# Altium PCB multisheet PCB1.PcbDoc
Units mil, origin at the board's own origin, x right, y up, seen from the top; angles counter-clockwise.
Board outline 3500 x 2500 mil, 4 copper layers (Top Layer 1, Top Layer, Bottom Layer, Bottom Layer 1), stack 23.756 mil thick; 6 components, 5 nets, 49 pads, 0 vias.
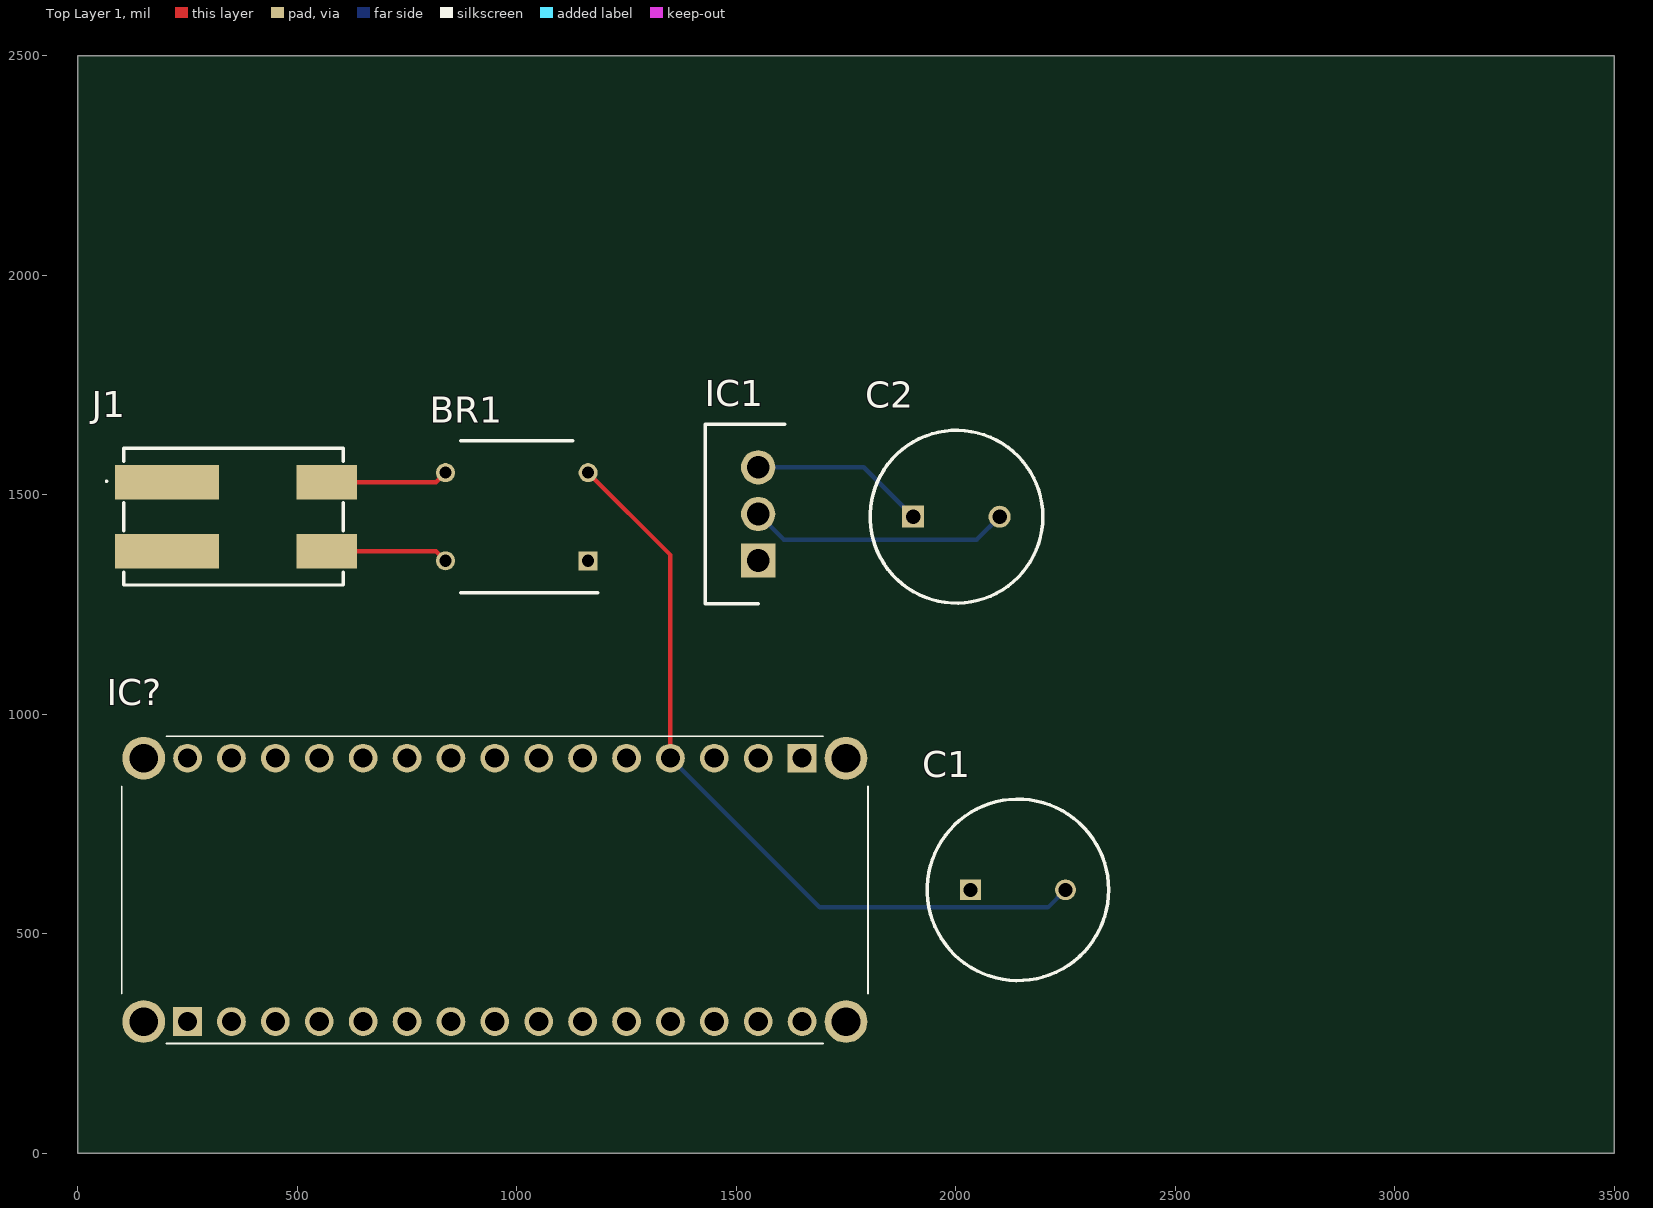
[diagram p0: Top Layer 1 view]
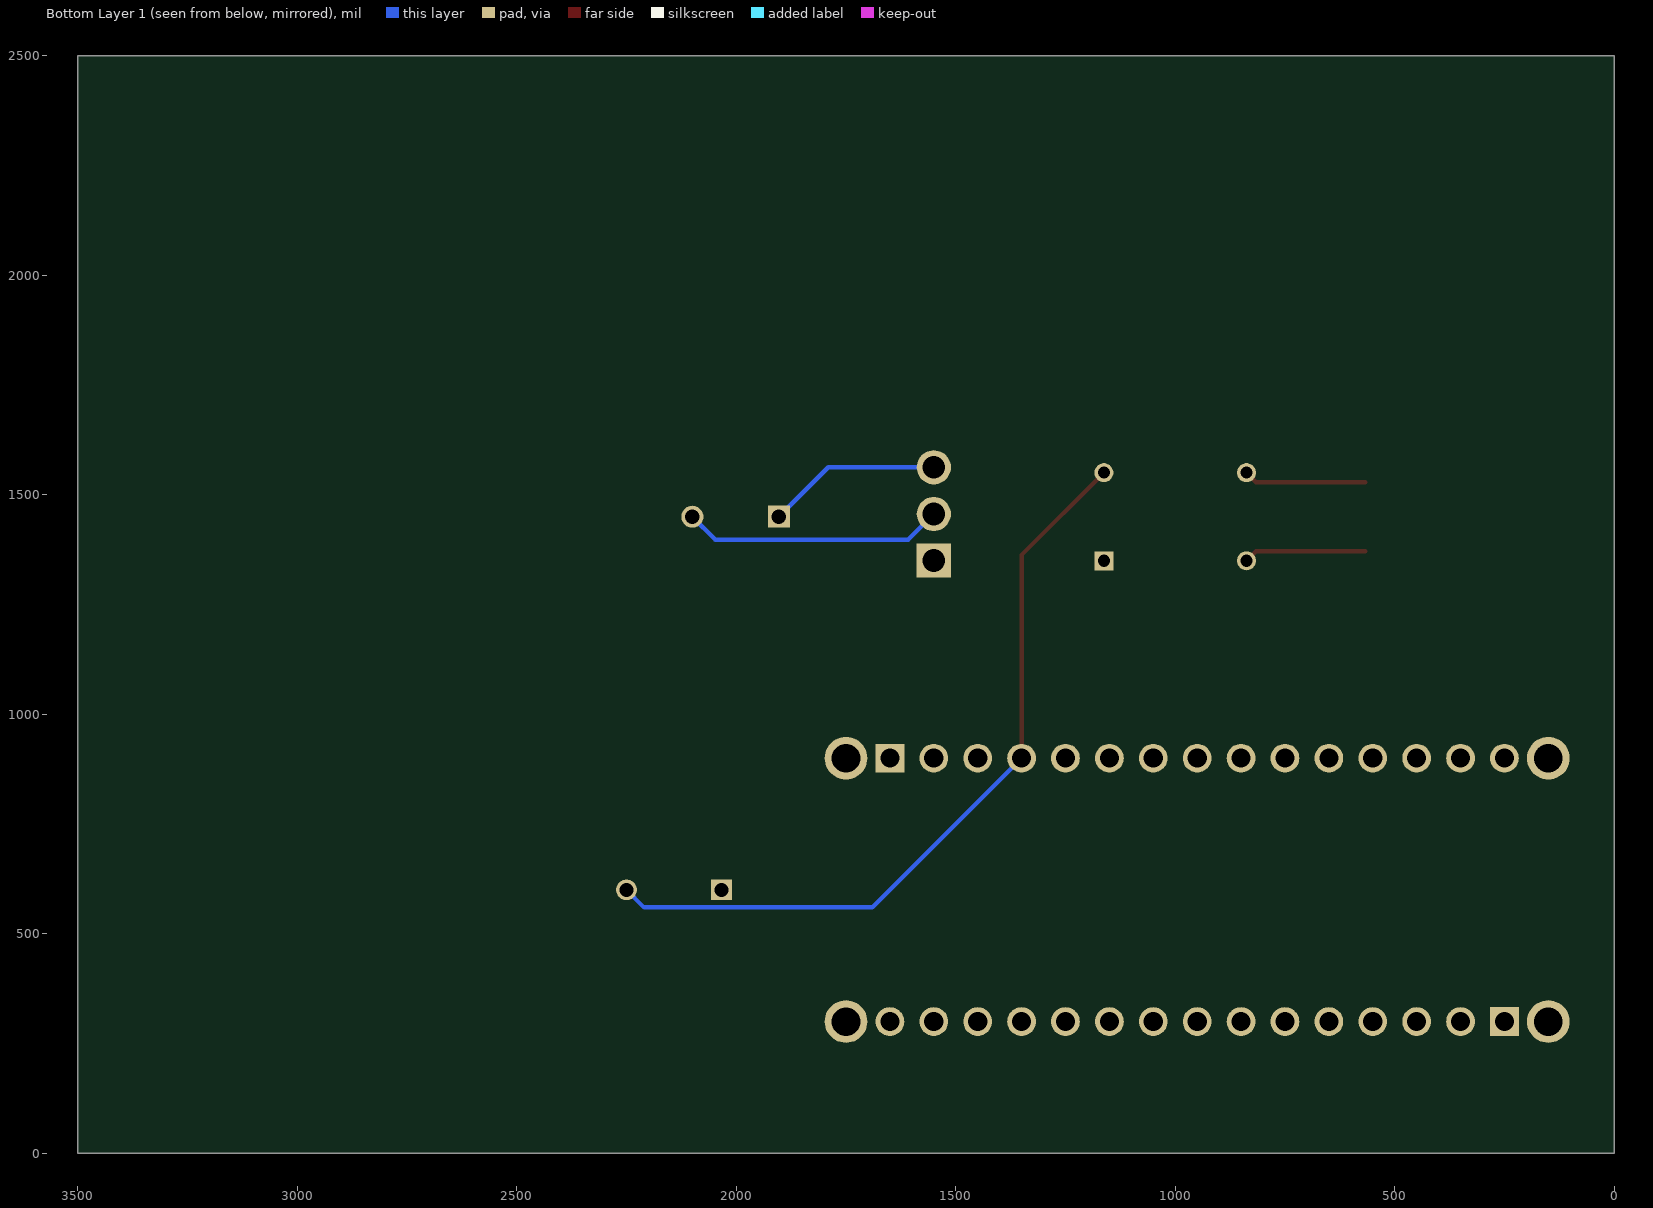
[diagram p1: Bottom Layer 1 view, seen from below]
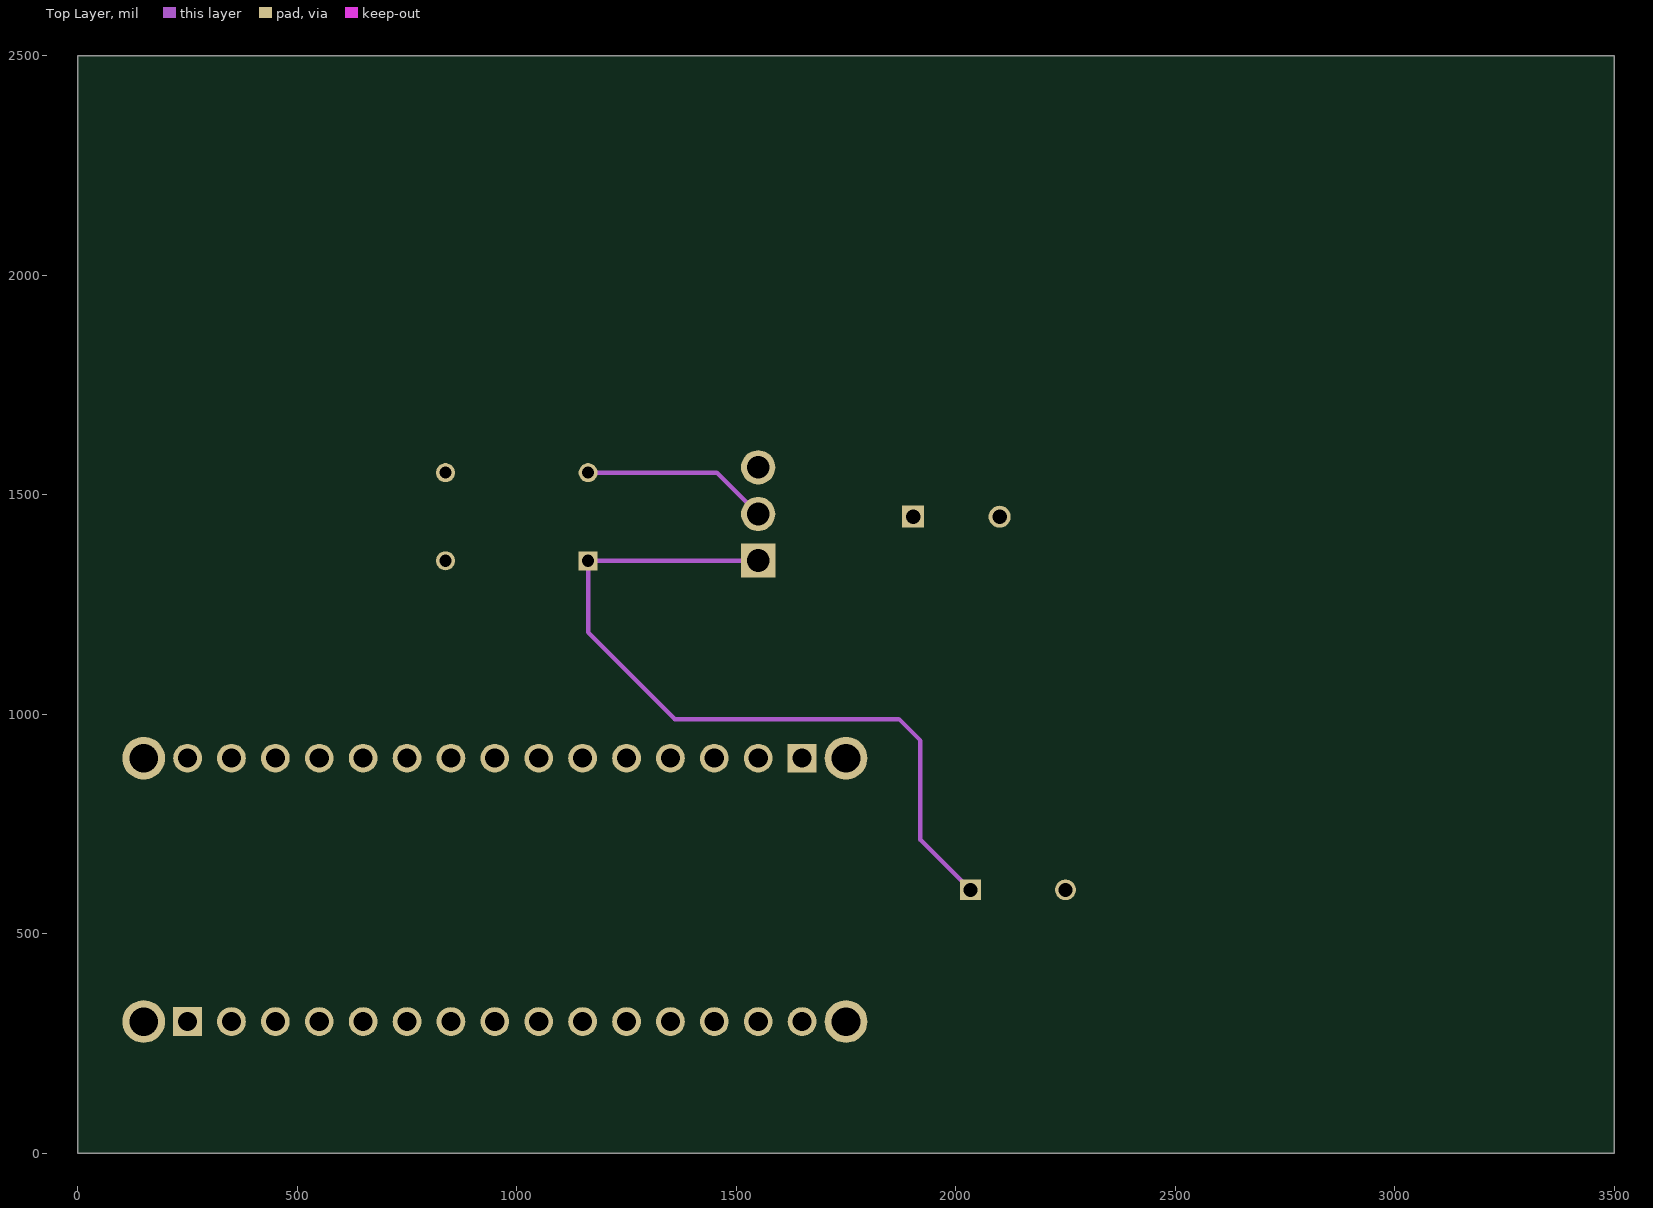
[diagram p2: Top Layer]
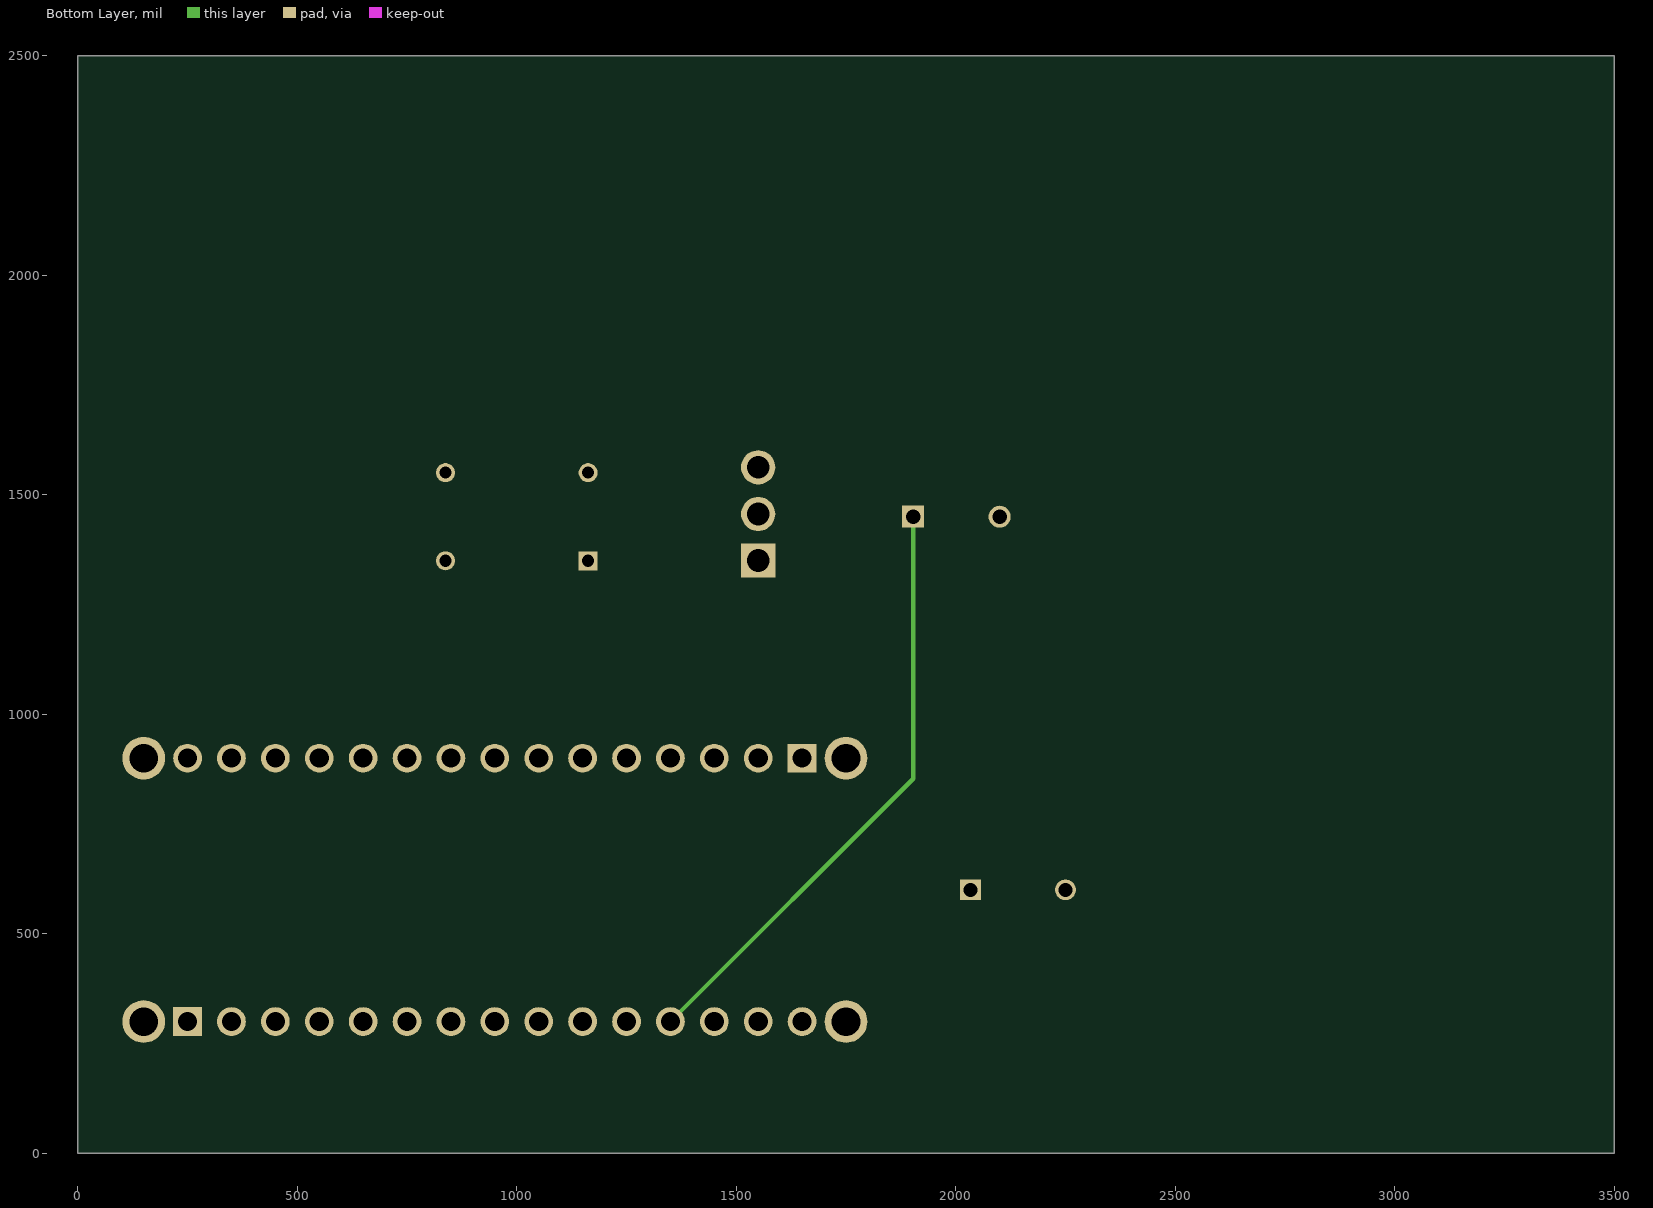
[diagram p3: Bottom Layer]
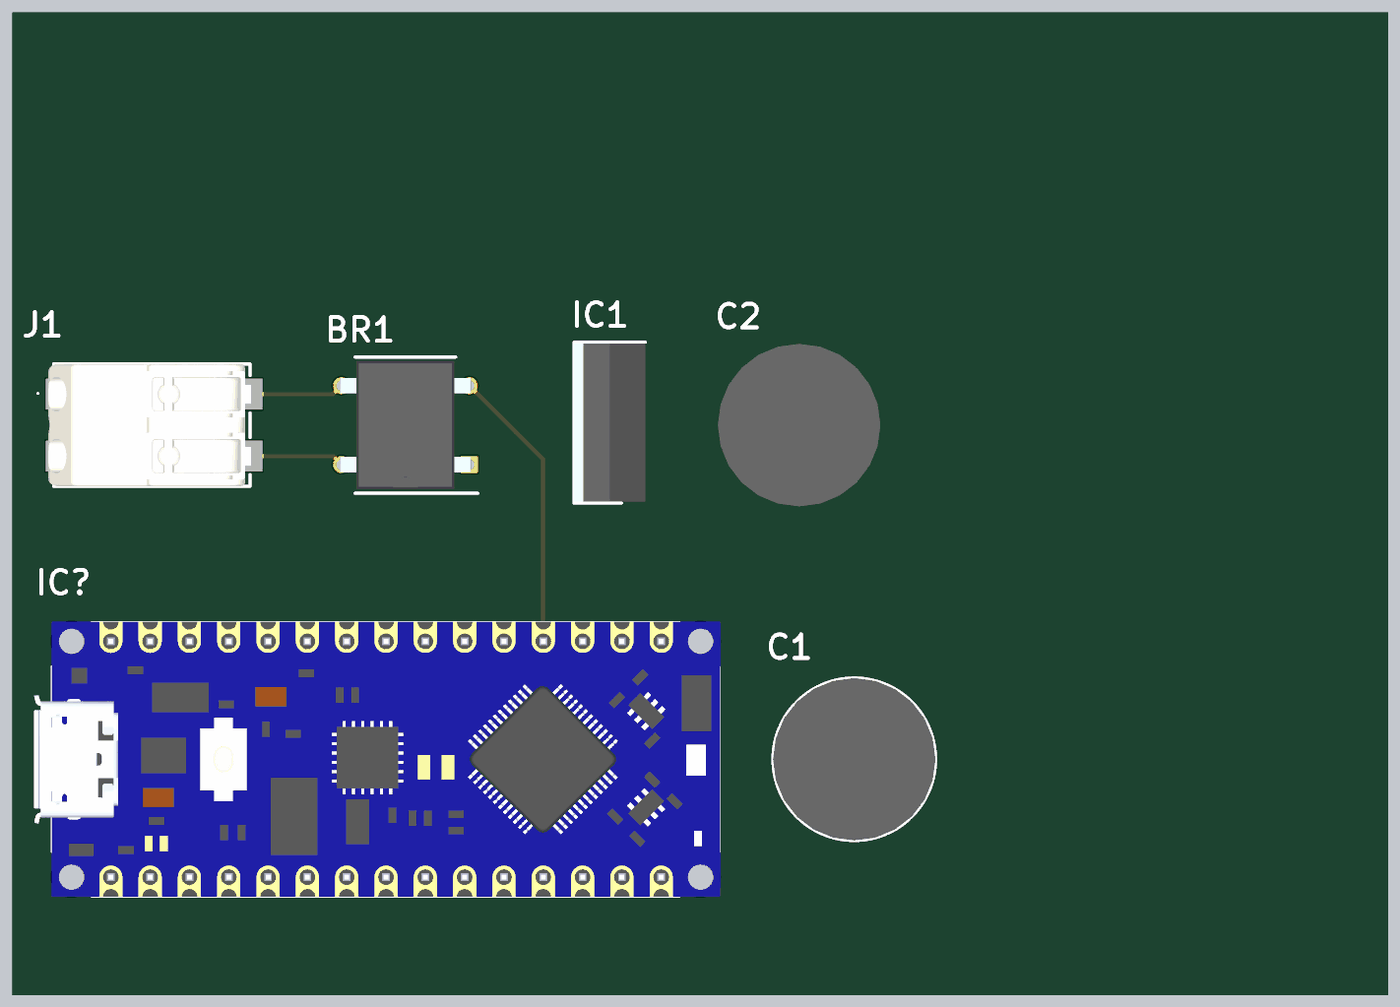
[diagram p4: 3D render of the assembled board from above, using the file's embedded part models]

## Layer stack, top to bottom
Top Solder: solder mask 0.4, Solder Resist, Dk 3.5
Top Layer 1: signal copper 1.378
Dielectric 2: prepreg 2.8, PP-006, Dk 4.1
Top Layer: signal copper 1.4
Dielectric 1: dielectric 12.6, FR-4, Dk 4.8
Bottom Layer: signal copper 1.4
Dielectric 3: prepreg 2.8, PP-006, Dk 4.1
Bottom Layer 1: signal copper 1.378
Bottom Solder: solder mask 0.4, Solder Resist, Dk 3.5

## Board outline
0,0 3500,0 3500,2500 0,2500

## Design rules (kind name [scope] priority, off if disabled: settings)
Clearance [All] p1: gap=10 ignorepadtopadclearanceinfootprint=FALSE except(0: Arc-Hole Track-Hole SMDPad-Hole THPad-Hole Via-Hole Fill-Hole Poly-Hole Region-Hole Text-Hole)
PolygonConnect [All] p1: connectstyle=Relief reliefconductorwidth=10 reliefentries=4 polygonreliefangle="90 Angle" airgapwidth=10
RoutingVias [All] p1: holewidth=28 width=50 viastyle="Through Hole" minholewidth=28 minwidth=50 maxholewidth=28 maxwidth=50
SolderMaskExpansion [All] p1: expansion=4 istentingtop=FALSE
Width [All] p1: maxlimit=10 minlimit=10 preferedwidth=10
30 further rules are at their usual default settings.

## Classes and differential pairs
component class multiSheet2: IC?
component class multiSheet1: BR1 C1 C2 IC1 J1

## Components (designator, comment, footprint, x,y, rotation, side; value= is the part's Value field where it differs from the comment)
BR1 "DB107" DIP825W50P510L830H340Q4N 1000,1450 r180 top
C1 "1000uf" CAPPRD550W60D1050H2150 2033.46,600 r0 top
C2 "100uf" CAPPRD500W65D1000H3200 1903.15,1450 r0 top
IC1 "L7806CV" TO270P460X1020X2008-3P 1550,1350 r90 top
IC? "ABX00028" ABX00028 250,300 r0 top
J1 "2060-452_998-404" 2060452998404 350,1450 r0 top

## Footprints (in the part's own frame and the unit in brackets; to place one, negate y for a bottom-side part, rotate by r counter-clockwise, add the part's x,y. Pads: shape width x height; smd on the part's side, far side on the other; paste and mask are expansions set on the pad)
2060452998404 [mm]
  rect 6x2 smd: 1(-3.725,2) 3(-3.725,-2)
  rect 3.5x2 smd: 2(5.525,2) 4(5.525,-2)
  silkscreen extent -7.27,-3.95 6.48,3.95, body extent -6.55,-3.95 6.55,3.95, height 4.5
ABX00028 [mm]
  rect 1.665x1.665 hole 1.11: A1(0,0) B1(35.56,15.24)
  round 1.665 hole 1.11: A2(2.54,0) A3(5.08,0) A4(7.62,0) A5(10.16,0) A6(12.7,0) A7(15.24,0) A8(17.78,0) A9(20.32,0) A10(22.86,0) A11(25.4,0) A12(27.94,0) A13(30.48,0) A14(33.02,0) A15(35.56,0) B2(33.02,15.24) B3(30.48,15.24) B4(27.94,15.24) B5(25.4,15.24) B6(22.86,15.24) B7(20.32,15.24) B8(17.78,15.24) B9(15.24,15.24) B10(12.7,15.24) B11(10.16,15.24) B12(7.62,15.24) B13(5.08,15.24) B14(2.54,15.24) B15(0,15.24)
  round 2.475 hole 1.65: MH1(-2.54,0) MH2(-2.54,15.24) MH3(38.1,15.24) MH4(38.1,0)
  silkscreen extent -3.81,-1.27 39.37,16.51, body extent -4.94,-1.27 39.39,16.51, height 6
CAPPRD500W65D1000H3200 [mm]
  rect 1.275x1.275 hole 0.85: 1(0,0)
  round 1.275 hole 0.85: 2(5,0)
  silkscreen extent -2.5,-5 7.5,5, body extent -2.73,-5.25 7.75,5.25, height 32
CAPPRD550W60D1050H2150 [mm]
  rect 1.2x1.2 hole 0.8: 1(0,0)
  round 1.2 hole 0.8: 2(5.5,0)
  silkscreen extent -2.5,-5.25 8,5.25, body extent -2.5,-5.24 8,5.24, height 21.5
DIP825W50P510L830H340Q4N [mm]
  rect 1.1x1.1 hole 0.7: 1(-4.125,2.55)
  round 1.1 hole 0.7: 2(-4.125,-2.55) 3(4.125,-2.55) 4(4.125,2.55)
  silkscreen extent -4.68,-4.4 3.25,4.4, body extent -4.25,-4.15 4.25,4.15, height 3.4
TO270P460X1020X2008-3P [mm]
  rect 1.98x1.98 hole 1.32: 1(0,0)
  round 1.98 hole 1.32: 2(2.7,0) 3(5.4,0)
  silkscreen extent -2.5,-1.53 7.9,3.07, body extent -2.4,-1.53 7.8,3.07, height 19.22

## Part data
BR1: "Bridge Rectifier", Manufacturer_Name=Rectron, Mouser Part Number=583-DB107, Datasheet Link=https://www.rectron.com/data_sheets/db101-107.pdf, Height=3.4mm, Manufacturer_Part_Number=DB107, Mouser Price/Stock=https://www.mouser.co.uk/ProductDetail/Rectron/DB107?qs=G5AQjGfRJcLGAY%252B6bEDnbw%3D%3D
C1: library part 108CKE025M, "Capacitor Polarised", Manufacturer_Name="Cinch Connectivity Solutions", Datasheet Link=https://componentsearchengine.com/Datasheets/2/108CKE025M.pdf, Height=21.5mm, Manufacturer_Part_Number=108CKE025M
C2: library part EEU-FC2A101L, "Capacitor Polarised", Manufacturer_Name=Panasonic, Mouser Part Number=667-EEU-FC2A101L, Arrow Part Number=EEU-FC2A101L, Arrow Price/Stock=https://www.arrow.com/en/products/eeu-fc2a101l/panasonic?region=nac, Datasheet Link=http://industrial.panasonic.com/cdbs/www-data/pdf/RDF0000/ABA0000C1209.pdf, Height=32mm, Manufacturer_Part_Number=EEU-FC2A101L, Mouser Price/Stock=https://www.mouser.co.uk/ProductDetail/Panasonic/EEU-FC2A101L?qs=MtOUKumLmnYYrYsMGpDvcw%3D%3D
IC1: "Integrated Circuit", Manufacturer_Name=STMicroelectronics, Mouser Part Number=511-L7806CV, Arrow Part Number=L7806CV, Arrow Price/Stock=https://www.arrow.com/en/products/l7806cv/stmicroelectronics?region=europe, Datasheet Link=http://www.st.com/web/en/resource/technical/document/datasheet/CD00000444.pdf, Height=4.6mm, Manufacturer_Part_Number=L7806CV, Mouser Price/Stock=https://www.mouser.co.uk/ProductDetail/STMicroelectronics/L7806CV?qs=K4DpzJ20gDEC%252BHE13eVUwg%3D%3D
IC?: "Integrated Circuit", Manufacturer_Name=Arduino, Mouser Part Number=782-ABX00028, Arrow Part Number=ABX00028, Arrow Price/Stock=https://www.arrow.com/en/products/abx00028/arduino-corporation?region=nac, Datasheet Link=https://store.arduino.cc/arduino-nano-every, Height=10mm, Manufacturer_Part_Number=ABX00028, Mouser Price/Stock=https://www.mouser.co.uk/ProductDetail/Arduino/ABX00028?qs=PzGy0jfpSMtit6rnFl8mVg%3D%3D
J1: "Connector", Arrow Part Number=2060-452/998-404, Manufacturer_Name=Wago, Arrow Price/Stock=https://www.arrow.com/en/products/2060-452998-404/wago-kontakttechnik-gmbh?region=nac, Datasheet Link=https://www.wago.com/2060-452/998-404, Height=4.5mm, Manufacturer_Part_Number=2060-452/998-404

## Nets (pads, with @x,y where several pads share a name; then routed paths per layer and width w, separated by ;. In a path a pad name is that pad's centre, name@x,y a point inside that pad or via, vN(x,y) a via of type N, cw(c..) or ccw(c..) an arc to the next point about the centre after c; other vN are vias at no path point)
NetBR1_1: BR1.1 C1.1 IC1.1 | length 1797.2
  Top Layer w10: IC1.1 1276,1350 1275.61,1349.61 BR1.1 1162.4,1186.6 1360,989 1870.46,989 1919.46,940 1919.46,714 C1.1
NetBR1_3: BR1.3 J1.2 | length 279
  Top Layer 1 w10: J1.2 815.94,1528.74 BR1.3
NetBR1_4: BR1.4 J1.4 | length 279
  Top Layer 1 w10: J1.4 815.94,1371.26 BR1.4
p1: C2.1 IC1.3 IC?.A12 | length 1778.9
  Bottom Layer w10: IC?.A12 1903.15,853.15 C2.1
  Bottom Layer 1 w10: IC1.3 1790.55,1562.6 C2.1
p2: BR1.2 C1.2 C2.2 IC1.2 IC?.B4 | length 2807.8
  Top Layer 1 w10: BR1.2 1350,1362.8 IC?.B4
  Top Layer w10: BR1.2 1455.91,1550.39 IC1.2
  Bottom Layer 1 w10: IC?.B4 1690,560 2210,560 C1.2 ; IC1.2 1608.3,1398 2048,1398 C2.2
pads on no net: IC?.A1 IC?.A2 IC?.A3 IC?.A4 IC?.A5 IC?.A6 IC?.A7 IC?.A8 IC?.A9 IC?.A10 IC?.A11 IC?.A13 IC?.A14 IC?.A15 IC?.B1 IC?.B2 IC?.B3 IC?.B5 IC?.B6 IC?.B7 IC?.B8 IC?.B9 IC?.B10 IC?.B11 IC?.B12 IC?.B13 IC?.B14 IC?.B15 IC?.MH1 IC?.MH2 IC?.MH3 IC?.MH4 J1.1 J1.3